# EAGLE board chart3 (EAGLE 7.6.0)

Size 72.39 x 63.5 mm. Coordinates in mm from the lower left corner, seen from the top.
Outline: 0,0 0,63.5 72.39,63.5 72.39,0 0,0
Copper layers (1*16): Top 0.035mm / dielectric 1.5mm / Bottom 0.035mm
Design rules "chart2": minimum track width 8mil, minimum drill 20mil, track to track 0.205mm, track to pad 0.205mm, pad to pad 0.205mm, via to via 0.205mm, smd to smd 8mil, copper to edge 10mil, drill to drill 8mil, minimum pad ring 12mil, minimum via ring 10mil, stop-mask expansion 4mil, vias tented up to drill 25mil, thermal gap 10mil
Net classes: 0 default: width 0.254 mm, clearance 0.205 mm; 1 ground: width 0.635 mm, clearance 0.205 mm to class 0, clearance 0.254 mm; 2 VCC: width 0.635 mm, clearance 0.205 mm to class 0, clearance 0.205 mm to class 1, clearance 0.254 mm

## Footprints (pad centres in the part's own frame; a part is rotated, then mirrored left to right if it is on the bottom)
UNO_R3_SHIELD = drill 1.016 pad 1.88: 3.3V 50.8,26.67; 5V 50.8,29.21; A0 50.8,41.91; A1 50.8,44.45; A2 50.8,46.99; A3 50.8,49.53; A4 50.8,52.07; A5 50.8,54.61; AREF 2.54,15.24; D2 2.54,49.53; D3 2.54,46.99; D4 2.54,44.45; D5 2.54,41.91; D6 2.54,39.37; D7 2.54,36.83; D8 2.54,33.02; D9 2.54,30.48; D10 2.54,27.94; D11 2.54,25.4; D12 2.54,22.86; D13 2.54,20.32; GND@0 50.8,31.75; GND@1 50.8,34.29; GND@2 2.54,17.78; IOREF 50.8,21.59; NC 50.8,19.05; RES 50.8,24.13; RX 2.54,54.61; SCL 2.54,10.16; SDA 2.54,12.7; TX 2.54,52.07; VIN 50.8,36.83
CON16_2X8_S4 = drill 0.965 pad 1.524 square: 1 -17.78,2.54 | drill 0.965 pad 1.524: 2 -17.78,0; 3 -15.24,2.54; 4 -15.24,0; 5 -12.7,2.54; 6 -12.7,0; 7 -10.16,2.54; 8 -10.16,0; 9 -7.62,2.54; 10 -7.62,0; 11 -5.08,2.54; 12 -5.08,0; 13 -2.54,2.54; 14 -2.54,0; 15 0,2.54; 16 0,0
1X07 = drill 1.016 long: 1 -7.62,0; 2 -5.08,0; 3 -2.54,0; 4 0,0; 5 2.54,0; 6 5.08,0; 7 7.62,0
AXIAL-0.4 = drill 0.9 pad 1.88: P$1 -5.08,0; P$2 5.08,0
DIP254P762X508-16 = drill 1.118 square: 1 -7.62,17.78 | drill 1.118: 2 -7.62,15.24; 3 -7.62,12.7; 4 -7.62,10.16; 5 -7.62,7.62; 6 -7.62,5.08; 7 -7.62,2.54; 8 -7.62,0; 9 0,0; 10 0,2.54; 11 0,5.08; 12 0,7.62; 13 0,10.16; 14 0,12.7; 15 0,15.24; 16 0,17.78

## Placement (x,y rotation side)
B0  ARDUINO_R3_SHIELD  [UNO_R3_SHIELD]  10.16,2.54 0 top
J2  5103308-3  [CON16_2X8_S4]  5.08,6.35 270 top
J3  5103308-3  [CON16_2X8_S4]  5.08,34.29 270 top
J4  5103308-3  [CON16_2X8_S4]  19.05,60.96 180 top
J5  5103308-3  [CON16_2X8_S4]  68.58,52.07 90 top
J6  5103308-3  [CON16_2X8_S4]  68.58,24.13 90 top
JPRTC0  Tiny RTC  [1X07]  53.34,60.96 0 top
R0  180  [AXIAL-0.4]  22.86,26.67 0 top
R1  180  [AXIAL-0.4]  22.86,52.07 0 top
R2  180  [AXIAL-0.4]  36.83,52.07 0 top
R3  180  [AXIAL-0.4]  50.8,52.07 0 top
R4  180  [AXIAL-0.4]  50.8,26.67 0 top
U0  TLC5916IN  [DIP254P762X508-16]  26.67,5.08 0 top
U1  TLC5916IN  [DIP254P762X508-16]  26.67,30.48 0 top
U2  TLC5916IN  [DIP254P762X508-16]  40.64,30.48 0 top
U3  TLC5916IN  [DIP254P762X508-16]  54.61,30.48 0 top
U4  TLC5916IN  [DIP254P762X508-16]  54.61,5.08 0 top

## Library data of the parts
B0 = SparkFun-Boards
J2-J6 = 510308; CATEGORY: Connectors; COLOR: Black; CONNECTORTYPE: Header, Shrouded; CONTACTFINISH: Gold or Gold-Palladium; CONTACTFINISHTHICKNESS: 15µin (0.38µm); CONTACTMATINGLENGTH: 0.240" (6.10mm); CONTACTTYPE: Male Pin; COPYRIGHT: Copyright (C) 2015 Accelerated Designs. All rights reserved; DATASHEET: http://documents.tycoelectronics.com/commerce/DocumentDelivery/DDEController?Action=srchrtrv&ampDocNm=5103308&ampDocType=CD&ampDocLang=EN; DIGIKEYPARTNUMBER: A33163-ND; FASTENINGTYPE: -; FEATURES: -; MANUFACTURER_PART_NUMBER: 5103308-3; MOUNTINGTYPE: Through Hole; NUMBEROFCONTACTSLOADED: All; NUMBEROFPOSITIONS: 16; NUMBEROFPOSITIONSLOADED: All; NUMBEROFROWS: 2; PACKAGING: Tube; PITCH: 0.100" (2.54mm); QUANTITY_AVAILABLE: 16245; ROWSPACING: 0.100" (2.54mm); SERIES: AMP-Latch™; TERMINATION: Solder; VENDOR: Tyco Electronics
JPRTC0 = pinhead
R0 R1-R4 = SparkFun-Resistors
U0 U1-U4 = Texas Instruments_By_element14_Batch_1; MPN: TLC5916IN; OC_FARNELL: 1647814; OC_NEWARK: 60M1749; PACKAGE: PDIP-16; SUPPLIER: Texas Instruments

## Nets
BAT-NC: JPRTC0.1
DATA0: B0.D11 U0.2
DATA1: U0.14 U1.2
DATA2: U1.14 U2.2
DATA3: U2.14 U3.2
DATA4: U3.14 U4.2
DS-NC: JPRTC0.6
GND [ground]: B0.GND@0 B0.GND@1 B0.GND@2 JPRTC0.2 R0.P$1 R1.P$1 R2.P$1 R3.P$1 R4.P$1 U0.1 U1.1 U2.1 U3.1 U4.1
L0-0: J2.16 U0.5
L0-1: J2.14 U0.6
L0-2: J2.12 U0.7
L0-3: J2.10 U0.8
L0-4: J2.8 U0.9
L0-5: J2.6 U0.10
L0-6: J2.4 U0.11
L0-7: J2.2 U0.12
L1-0: J3.16 U1.5
L1-1: J3.14 U1.6
L1-2: J3.12 U1.7
L1-3: J3.10 U1.8
L1-4: J3.8 U1.9
L1-5: J3.6 U1.10
L1-6: J3.4 U1.11
L1-7: J3.2 U1.12
L2-0: J4.16 U2.5
L2-1: J4.14 U2.6
L2-2: J4.12 U2.7
L2-3: J4.10 U2.8
L2-4: J4.8 U2.9
L2-5: J4.6 U2.10
L2-6: J4.4 U2.11
L2-7: J4.2 U2.12
L3-0: J5.16 U3.5
L3-1: J5.14 U3.6
L3-2: J5.12 U3.7
L3-3: J5.10 U3.8
L3-4: J5.8 U3.9
L3-5: J5.6 U3.10
L3-6: J5.4 U3.11
L3-7: J5.2 U3.12
L4-0: J6.16 U4.5
L4-1: J6.14 U4.6
L4-2: J6.12 U4.7
L4-3: J6.10 U4.8
L4-4: J6.8 U4.9
L4-5: J6.6 U4.10
L4-6: J6.4 U4.11
L4-7: J6.2 U4.12
LATCH: B0.D12 U0.4 U1.4 U2.4 U3.4 U4.4
N$1: R1.P$2 U1.15
N$2: R2.P$2 U2.15
N$3: R3.P$2 U3.15
N$4: R4.P$2 U4.15
N$6: R0.P$2 U0.15
PWM: B0.D3 U0.13 U1.13 U2.13 U3.13 U4.13
SCA: B0.A4 JPRTC0.4
SCK: B0.D8 U0.3 U1.3 U2.3 U3.3 U4.3
SCL: B0.A5 JPRTC0.5
SQ-NC: JPRTC0.7
VCC [VCC]: B0.5V J2.1 J2.3 J2.5 J2.7 J2.9 J2.11 J2.13 J2.15 J3.1 J3.3 J3.5 J3.7 J3.9 J3.11 J3.13 J3.15 J4.1 J4.3 J4.5 J4.7 J4.9 J4.11 J4.13 J4.15 J5.1 J5.3 J5.5 J5.7 J5.9 J5.11 J5.13 J5.15 J6.1 J6.3 J6.5 J6.7 J6.9 J6.11 J6.13 J6.15 JPRTC0.3
VDD [VCC]: B0.3.3V U0.16 U1.16 U2.16 U3.16 U4.16

## Tracks (layer width: path | path; a pad name or v marks a point on that pad's centre or on a via)
DATA0  (1 unrouted)
DATA1  (1 unrouted)
DATA2  (1 unrouted)
DATA3  (1 unrouted)
DATA4  (1 unrouted)
GND  (13 unrouted)
L0-0  (1 unrouted)
L0-1  (1 unrouted)
L0-2  (1 unrouted)
L0-3  (1 unrouted)
L0-4  (1 unrouted)
L0-5  (1 unrouted)
L0-6  (1 unrouted)
L0-7  (1 unrouted)
L1-0  (1 unrouted)
L1-1  (1 unrouted)
L1-2  (1 unrouted)
L1-3  (1 unrouted)
L1-4  (1 unrouted)
L1-5  (1 unrouted)
L1-6  (1 unrouted)
L1-7  (1 unrouted)
L2-0  (1 unrouted)
L2-1  (1 unrouted)
L2-2  (1 unrouted)
L2-3  (1 unrouted)
L2-4  (1 unrouted)
L2-5  (1 unrouted)
L2-6  (1 unrouted)
L2-7  (1 unrouted)
L3-0  (1 unrouted)
L3-1  (1 unrouted)
L3-2  (1 unrouted)
L3-3  (1 unrouted)
L3-4  (1 unrouted)
L3-5  (1 unrouted)
L3-6  (1 unrouted)
L3-7  (1 unrouted)
L4-0  (1 unrouted)
L4-1  (1 unrouted)
L4-2  (1 unrouted)
L4-3  (1 unrouted)
L4-4  (1 unrouted)
L4-5  (1 unrouted)
L4-6  (1 unrouted)
L4-7  (1 unrouted)
LATCH  (5 unrouted)
N$1  (1 unrouted)
N$2  (1 unrouted)
N$3  (1 unrouted)
N$4  (1 unrouted)
N$6  (1 unrouted)
PWM  (5 unrouted)
SCA  (1 unrouted)
SCK  (5 unrouted)
SCL  (1 unrouted)
VCC  (41 unrouted)
VDD  (5 unrouted)

## Text on the board
tDocu: Batt | Gnd | VCC | Batt
_tNames: JPRTC0 | J1 | R1 | R2 | R3 | U1 | U2 | U3 | R0 | R4 | U0 | U4 | J0
200bmp: C:/Users/jonross/Documents/Arduino/ChartLights/Eagle/Silkscreen/silk.bmp